# Altium PCB ESP32_garage_door PCB V1_1.PcbDoc
Units mil, origin at the board's own origin, x right, y up, seen from the top; angles counter-clockwise.
Board outline 6000 x 4000 mil, 2 copper layers (Top Layer, Bottom Layer); 26 components, 60 nets, 108 pads, 0 vias.
Unrouted connection lines stored in the file: 48.
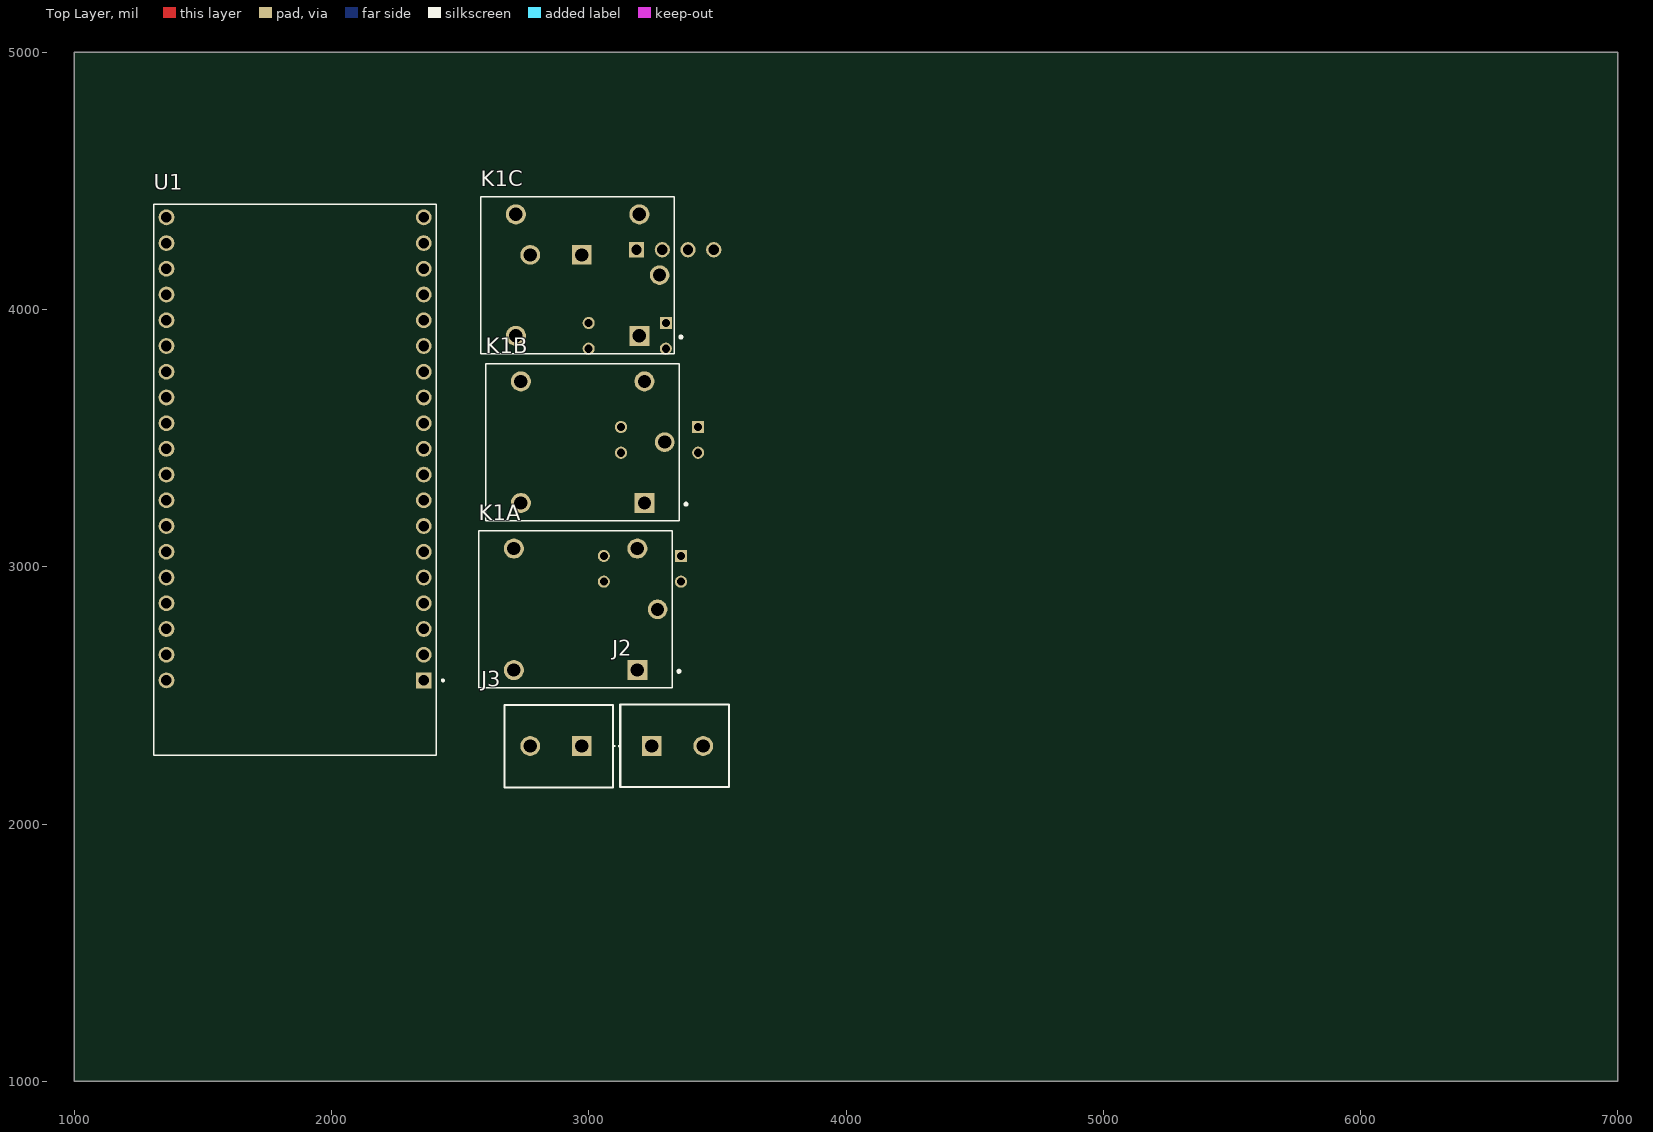
[diagram p0: Top Layer view]
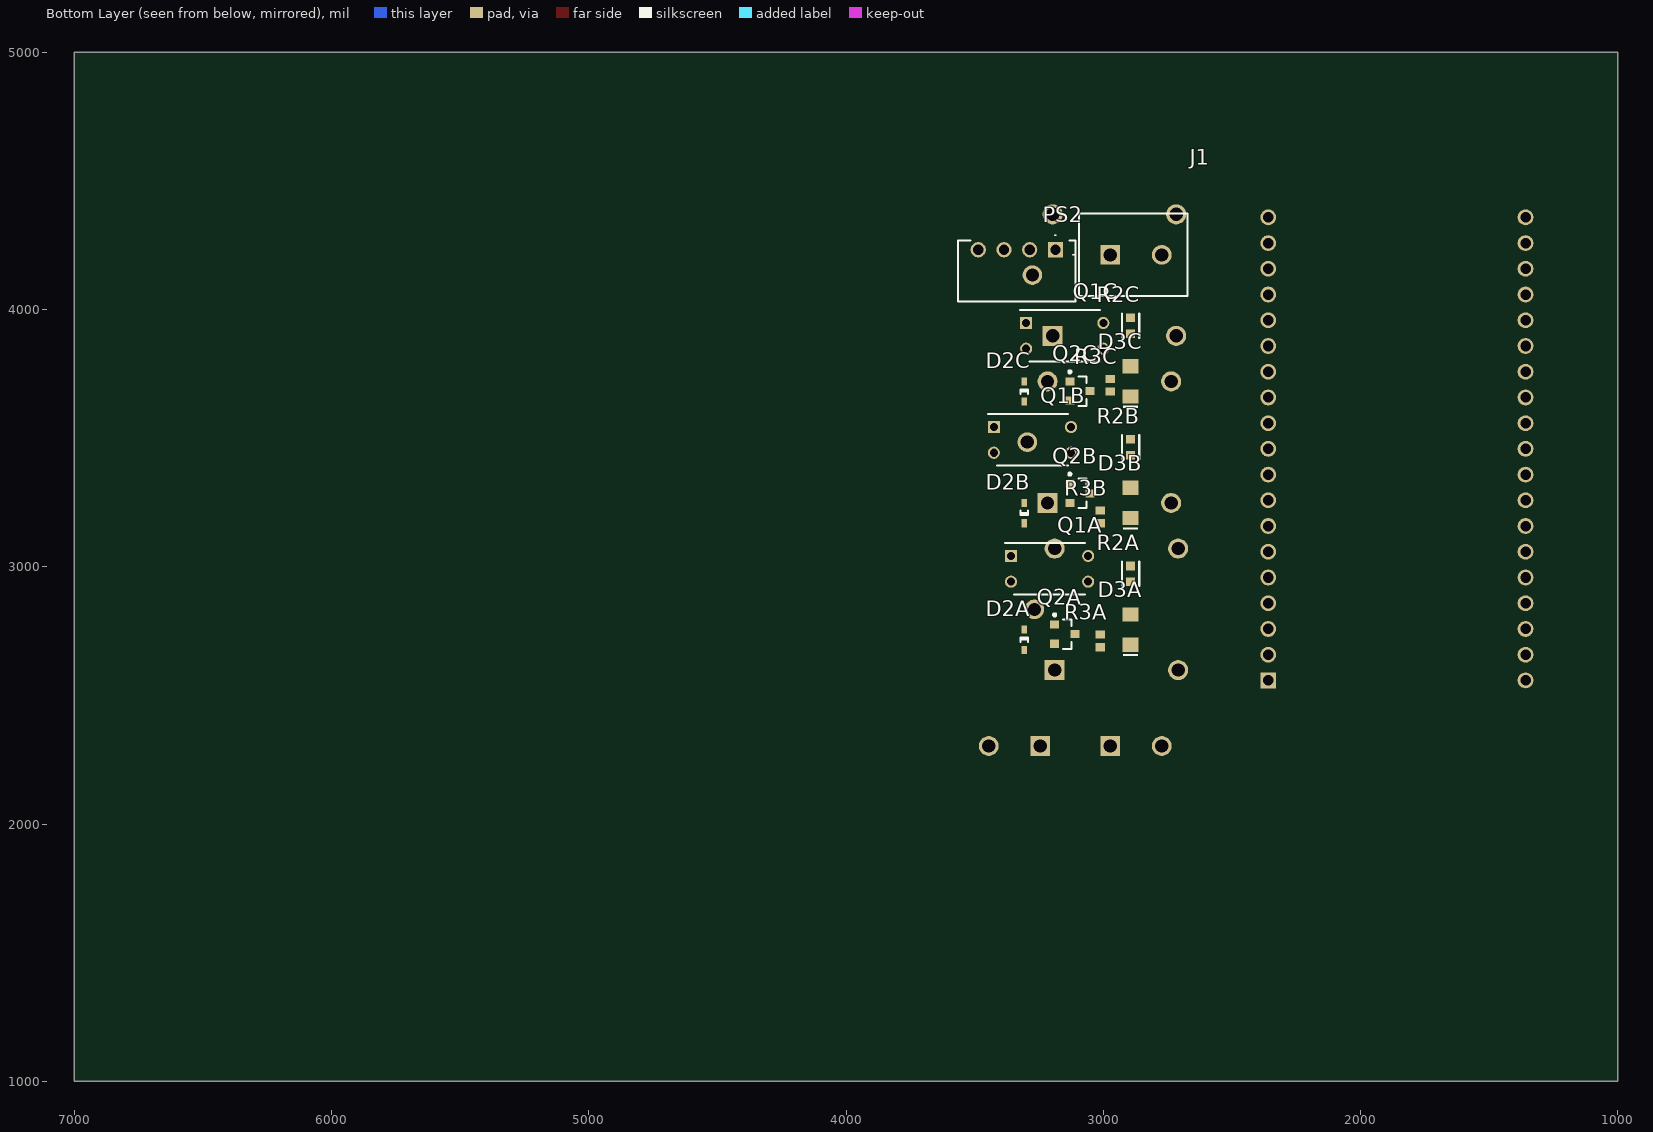
[diagram p1: Bottom Layer view, seen from below]

## Layer stack, top to bottom
Top Solder: solder mask 0.4, Solder Resist, Dk 3.5
Top Layer: signal copper 1.4
Dielectric 1: dielectric 12.6, FR-4, Dk 4.8
Bottom Layer: signal copper 1.4
Bottom Solder: solder mask 0.4, Solder Resist, Dk 3.5

## Board outline
1000,1000 7000,1000 7000,5000 1000,5000

## Design rules (kind name [scope] priority, off if disabled: settings)
Clearance [All] p1: gap=10 ignorepadtopadclearanceinfootprint=FALSE
PolygonConnect [All] p1: connectstyle=Relief reliefconductorwidth=10 reliefentries=4 polygonreliefangle="90 Angle" airgapwidth=10
RoutingVias [All] p1: holewidth=28 width=50 viastyle="Through Hole" minholewidth=28 minwidth=50 maxholewidth=28 maxwidth=50
SolderMaskExpansion [All] p1: expansion=4 istentingtop=FALSE
SupplyNets "Schematic Supply Nets_3" [InNet('24V')] p1: voltage=0.000
SupplyNets "Schematic Supply Nets_2" [InNet('3V3')] p2: voltage=0.000
SupplyNets "Schematic Supply Nets_1" [InNet('GND')] p3: voltage=0.000
SupplyNets "Schematic Supply Nets" [InNet('5V')] p4: voltage=0.000
Width [All] p1: maxlimit=10 minlimit=10 preferedwidth=10
30 further rules are at their usual default settings.

## Classes and differential pairs
channel class 1_Channel_Opto_Relay: U_1_Channel_Opto_Relay1 U_1_Channel_Opto_Relay2 U_1_Channel_Opto_Relay3
component class U_1_Channel_Opto_Relay3: D2C D3C K1C Q1C Q2C R2C R3C
component class U_1_Channel_Opto_Relay2: D2B D3B K1B Q1B Q2B R2B R3B
component class U_1_Channel_Opto_Relay1: D2A D3A K1A Q2A R2A R3A
component class ESP32_garage_door: J1 J2 J3 PS2 U1

## Components (designator, comment, footprint, x,y, rotation, side; value= is the part's Value field where it differs from the comment)
D2A "1N4148WT" FAIR-SOD-523F-2_V 3307.09,2716.54 r270 bottom (schematic designator D2)
D2B "1N4148WT" FAIR-SOD-523F-2_V 3307.09,3208.66 r90 bottom (schematic designator D2)
D2C "1N4148WT" FAIR-SOD-523F-2_V 3307.09,3681.1 r270 bottom (schematic designator D2)
D3A "150120YS75000" WL-SMCW_1206_150120xx75000 2893.7,2755.91 r90 bottom (schematic designator D3)
D3B "150120YS75000" WL-SMCW_1206_150120xx75000 2893.7,3248.03 r90 bottom (schematic designator D3)
D3C "150120YS75000" WL-SMCW_1206_150120xx75000 2893.7,3720.47 r90 bottom (schematic designator D3)
J1 "1548128" 1548128 2972.44,4212.6 r180 bottom
J2 "1548128" 1548128 3244.88,2303.15 r0 top
J3 "1548128" 1548128 2972.44,2303.15 r180 top
K1A "SRD-05VDC-SL-C" RELAY_SRD-05VDC-SL-C 2948.82,2834.65 r180 top (schematic designator K1)
K1B "SRD-05VDC-SL-C" RELAY_SRD-05VDC-SL-C 2976.38,3484.25 r180 top (schematic designator K1)
K1C "SRD-05VDC-SL-C" RELAY_SRD-05VDC-SL-C 2956.69,4133.86 r180 top (schematic designator K1)
PS2 "1779205311" 1779205311 3185.83,4232.28 r0 bottom
Q1A "LTV-817C" DIP762W60P254L460H450Q4N 3208.66,2992.13 r180 bottom (schematic designator Q1)
Q1B "LTV-817C" DIP762W60P254L460H450Q4N 3275.2,3493.31 r180 bottom (schematic designator Q1)
Q1C "LTV-817C" DIP762W60P254L460H450Q4N 3149.61,3897.64 r180 bottom (schematic designator Q1)
Q2A "MMBTA42LT1G" ONSC-SOT-23-3-318-08_V 3149.61,2738.19 r180 bottom (schematic designator Q2)
Q2B "MMBTA42LT1G" ONSC-SOT-23-3-318-08_V 3090.55,3285.43 r180 bottom (schematic designator Q2)
Q2C "MMBTA42LT1G" ONSC-SOT-23-3-318-08_V 3090.55,3683.07 r180 bottom (schematic designator Q2)
R2A "AC0603FR-071KL" FP-AC0603-IPC_B 2893.7,2972.44 r90 bottom (schematic designator R2)
R2B "AC0603FR-071KL" FP-AC0603-IPC_B 2893.7,3464.57 r270 bottom (schematic designator R2)
R2C "AC0603FR-071KL" FP-AC0603-IPC_B 2893.7,3937.01 r90 bottom (schematic designator R2)
R3A "CRCW0603510RFKEA" RESC1609X50X30NL10T20 3011.81,2711.61 r270 bottom (schematic designator R3)
R3B "CRCW0603510RFKEA" RESC1609X50X30NL10T20 3011.81,3193.9 r270 bottom (schematic designator R3)
R3C "CRCW0603510RFKEA" RESC1609X50X30NL10T20 2972.44,3705.71 r270 bottom (schematic designator R3)
U1 "ESP32-DEVKITC-32D" MODULE_ESP32-DEVKITC-32D 1858.27,3336.22 r180 top

## Footprints (in the part's own frame and the unit in brackets; to place one, negate y for a bottom-side part, rotate by r counter-clockwise, add the part's x,y. Pads: shape width x height; smd on the part's side, far side on the other; paste and mask are expansions set on the pad)
1548128 [mm]
  rect 1.95x1.95 hole 1.3: 1(0,0)
  round 1.95 hole 1.3: 2(5.08,0)
  silkscreen extent -3.7,-4.05 7.62,4.1, body extent -0.57,0 10.15,8.15, height 9.97
1779205311 [mm]
  rect 1.5x1.5 hole 1: 1(0,0)
  round 1.5 hole 1: 2(2.54,0) 3(5.08,0) 4(7.62,0)
  silkscreen extent -1.99,-1.5 9.61,5.1, body extent -1.99,-0.9 9.61,5.1, height 10.51
DIP762W60P254L460H450Q4N [mm]
  rect 1.2x1.2 hole 0.8: 1(-3.81,1.27)
  round 1.2 hole 0.8: 2(-3.81,-1.27) 3(3.81,-1.27) 4(3.81,1.27)
  silkscreen extent -4.41,-2.55 3.5,2.55, body extent -3.96,-2.3 3.96,2.3, height 4.5
FAIR-SOD-523F-2_V [mm] "SMD, 2-Leads, Body 1.2x0.8mm, Height 0.7mm"
  rect 0.8x0.5 smd: 1(-1,0) 2(1,0)
  silkscreen extent -0.2,-0.38 0.24,0.38, body extent -0.6,-0.4 0.6,0.4, height 0.71
FP-AC0603-IPC_B [mil]
  rect 33.81x35.91 smd paste+0 mask+0: 1(-30.58,0) 2(30.58,0)
  silkscreen extent -47,-34 47,34, body extent -31,-16 31,16, height 22
MODULE_ESP32-DEVKITC-32D [mm]
  rect 1.56x1.56 / inner round 1.56 / far side rect 1.56x1.56 hole 1.04: J2-1(-12.7,19.76)
  round 1.56 hole 1.04: J2-2(-12.7,17.22) J2-3(-12.7,14.68) J2-4(-12.7,12.14) J2-5(-12.7,9.6) J2-6(-12.7,7.06) J2-7(-12.7,4.52) J2-8(-12.7,1.98) J2-9(-12.7,-0.56) J2-10(-12.7,-3.1) J2-11(-12.7,-5.64) J2-12(-12.7,-8.18) J2-13(-12.7,-10.72) J2-14(-12.7,-13.26) J2-15(-12.7,-15.8) J2-16(-12.7,-18.34) J2-17(-12.7,-20.88) J2-18(-12.7,-23.42) J2-19(-12.7,-25.96) J3-1(12.7,19.76) J3-2(12.7,17.22) J3-3(12.7,14.68) J3-4(12.7,12.14) J3-5(12.7,9.6) J3-6(12.7,7.06) J3-7(12.7,4.52) J3-8(12.7,1.98) J3-9(12.7,-0.56) J3-10(12.7,-3.1) J3-11(12.7,-5.64) J3-12(12.7,-8.18) J3-13(12.7,-10.72) J3-14(12.7,-13.26) J3-15(12.7,-15.8) J3-16(12.7,-18.34) J3-17(12.7,-20.88) J3-18(12.7,-23.42) J3-19(12.7,-25.96)
  silkscreen extent -14.7,-27.25 13.95,27.15, body extent -13.97,-27.9 13.97,27.2, height 6.69
ONSC-SOT-23-3-318-08_V [mm] "SOT23, 3-Leads, Body 2.92x1.3mm, Pitch 0.95mm"
  rect 0.9x0.8 smd: 1(-1,0.95) 2(-1,-0.95) 3(1,0)
  silkscreen extent -1.13,-1.46 0.65,2.02, body extent -0.65,-1.46 0.65,1.46, height 1.11
RELAY_SRD-05VDC-SL-C [mm]
  rect 1.98x1.98 / inner round 1.98 / far side rect 1.98x1.98 hole 1.32: A1(-6.1,6)
  round 1.98 hole 1.32: A2(-6.1,-6) NC(6.1,6) NO(6.1,-6)
  round 1.935 hole 1.29: COM(-8.1,0)
  silkscreen extent -10.3,-7.75 9.55,7.75, body extent -9.6,-7.8 9.6,7.8, height 15.8
RESC1609X50X30NL10T20 [mm] "Chip Resistor, 2-Leads, Body 1.55x0.85mm, IPC Medium Density"
  rect 0.8x0.95 smd: 1(-0.625,0) 2(0.625,0)
  body extent -0.82,-0.48 0.82,0.48, height 0.5
WL-SMCW_1206_150120xx75000 [mm] "SMD Mono-color Chip LED, body 3.2x1.6mm"
  rect 1.4x1.6 smd: 1(-1.5,0) 2(1.5,0)
  silkscreen extent -2.6,-0.75 -2.4,0.75, body extent -1.6,-0.8 1.6,0.8, height 0.68

## Part data
D2A D2B D2C: library part CMP-0881-00001-1, "High Conductance Fast Switching Diode, 75 V, -55 to 150 degC, 2-Pin SOD523F, RoHS", Manufacturer="Fairchild Semiconductor", Temperature Range="-55 to 150 degC", BVR (IR="5 uA)=75 V Min.", CO="4 pF Max.", ComponentLink1Description="Manufacturer URL", ComponentLink1URL=http://www.fairchildsemi.com/, ComponentLink2Description=Datasheet, ComponentLink2URL=http://www.fairchildsemi.com/ds/1N/1N4148WT.pdf, DatasheetVersion="Rev. A2", IR (VR="75 V)=5 uA Max.", Mounting Technology="Surface Mount", PackageDescription="2-Pin Surface Mount Device, Body 1.2 x 0.8 mm, Height 0.7 mm", PackageReference=SOD-523F-2, PartNumber=1N4148WT, RoHS=TRUE, VF="1 V Max."
D3A D3B D3C: library part CMP-1426-00019-3, "Led, Yellow, 590 Nm, 2 V, 30 Ma, 120 Mcd Rohs Compliant: Yes", Case Code (Imperial)=1206, Case Code (Metric)=3216, Color=Yellow, Forward Current=100mA, Forward Voltage=2V, Max Operating Temperature=85°C, Max Reverse Voltage (DC)=5V, Min Operating Temperature=-40°C, Test Current=20mA, Case/Package=1206, Dominant Wavelength=590nm, Height=680µm, Length=3.2mm, Lens Style="Clear, Rectangular", Luminous Intensity=120mcd, Mount="Surface Mount", Packaging="Tape and Reel", Peak Wavelength=595nm, REACH SVHC=Unknown, RoHS=Compliant, Viewing Angle=140°, Wavelength=590nm, Width=1.6mm
J1 J2 J3: "Connector", Manufacturer_Name="Phoenix Contact", Mouser Part Number=651-1548128, Datasheet Link=https://product-download.phoenixcontact.com/8064728?response-content-disposition=inline;%20filename%3D%22pxc_1548128_00_05_MKDSN-1-5-2-5-08-SPE_FAM.pdf%22&Expires=1710663383&Signature=dNE3xUpP8aZKNM7MbijW96iZv~1ZSU7z-jr1GpV8auc4knETZVFd79aWCcONAeV4hWLRa32, Height=10.15mm, Manufacturer_Part_Number=1548128, Mouser Price/Stock=https://www.mouser.co.uk/ProductDetail/Phoenix-Contact/1548128?qs=ulEaXIWI0c87QOzP9yohxA%3D%3D
K1A K1B K1C: library part CMP-003-000000-1, "5V Trigger Relay Module For Arduino And Raspberry Pi 5V Trigger Relay Module For Arduino And Raspberry Pi", Package="NON STANDARD-5 Songle Relay", Availability="Not in stock", Check_prices=https://www.snapeda.com/parts/SRD-05VDC-SL-C/Songle+Relay/view-part/?ref=eda, Component Type=Standard, Design Item ID=SRD-05VDC-SL-C, MF="Songle Relay", MP=SRD-05VDC-SL-C, Pin Count=5, Price=None, SnapEDA_Link=https://www.snapeda.com/parts/SRD-05VDC-SL-C/Songle+Relay/view-part/?ref=snap, Source=SRD-05VDC-SL-C.SchLib
PS2: "Power Supply", Manufacturer_Name="Wurth Elektronik", Datasheet Link=https://www.we-online.com/components/products/datasheet/1779205311.pdf, Height=10.41mm, Manufacturer_Part_Number=1779205311
Q1A Q1B Q1C: "Phototransistor", Manufacturer_Name=Lite-On, Mouser Part Number=859-LTV-817C, Arrow Part Number=LTV-817C, Arrow Price/Stock=https://www.arrow.com/en/products/ltv-817-c/lite-on-technology?utm_currency=USD&region=europe, Datasheet Link=https://optoelectronics.liteon.com/upload/download/DS-70-96-0016/LTV-8X7%20series%20201610%20.pdf, Height=4.5mm, Manufacturer_Part_Number=LTV-817C, Mouser Price/Stock=https://www.mouser.co.uk/ProductDetail/Lite-On/LTV-817C?qs=WAWaI72GHKzVL8VAYU18sA%3D%3D
Q2A Q2B Q2C: library part CMP-1048-00662-1, "High Voltage Transistor, NPN Silicon, 3-Pin SOT-23, Pb-Free, Tape and Reel", Manufacturer="On Semiconductor", ComponentLink1Description="Manufacturer URL", ComponentLink1URL=http://www.onsemi.com/, ComponentLink2Description=Datasheet, ComponentLink2URL=http://www.onsemi.cn/pub_link/Collateral/MMBTA42LT1-D.PDF, ComponentLink3Description="Package Specification", ComponentLink3URL=http://www.onsemi.cn/pub_link/Collateral/318-08.PDF, DatasheetVersion="Rev. 12", fT Min (MHz)=50, IC Continuous (A)=0.5, Mounting Technology="Surface Mount", PackageDescription="3-Pin Small Outline Transistor, Body 2.92 x 1.3 mm, Pitch 0.95 mm", PackageReference=SOT-23-3-318-08, PackageVersion="Rev. AP, 11/2009", Packing="Tape and Reel", PartNumber=MMBTA42LT1G, Polarity=NPN, RoHS=TRUE
R2A R2B R2C: library part CMP-2000-04828-3, "RES 1kΩ 1.00% 0.1W 0603", Case Code (Imperial)=0603, Case Code (Metric)=1608, Max Operating Temperature=155°C, Max Power Dissipation=100mW, Min Operating Temperature=-55°C, Package Quantity=1, Ratings=AEC-Q200, Resistance=1kR, Resistor Type="Thick Film", Temperature Coefficient=100ppm/°C, Tolerance=1%, Voltage Rating=50V, Case/Package=0603, Construction=Rectangular, Depth=0.8mm, Features="Moisture Resistant", Height=0.022inch, Lead Free="Lead Free", Length=0.063inch, Military Standard=Not, Number of Terminations=2, Packaging="Tape and Reel", Power Rating=100mW, RoHS Compliant=Yes, Series=AC, Size Code=0603, Termination=SMD/SMT, Width=0.031inch
R3A R3B R3C: library part CMP-2000-03439-1, Manufacturer="Vishay Dale", Part Number=CRCW0603510RFKEA
U1: library part CMP-005-000000-1, "WiFi Development Tools (802.11) ESP32 General Development Kit, ESP32-WROOM-32D on the board", Package=None, Check_prices=https://www.snapeda.com/parts/ESP32-DEVKITC-32D/Espressif+Systems/view-part/?ref=eda, Component Type=Standard, Design Item ID=ESP32-DEVKITC-32D, MF="Espressif Systems", MP=ESP32-DEVKITC-32D, Pin Count=38, SnapEDA_Link=https://www.snapeda.com/parts/ESP32-DEVKITC-32D/Espressif+Systems/view-part/?ref=snap, Source=ESP32-DEVKITC-32D.SchLib

## Nets (pads, with @x,y where several pads share a name; then routed paths per layer and width w, separated by ;. In a path a pad name is that pad's centre, name@x,y a point inside that pad or via, vN(x,y) a via of type N, cw(c..) or ccw(c..) an arc to the next point about the centre after c; other vN are vias at no path point)
3V3: R2A.1 R2B.1 R2C.1 U1.J2-1
5V: D2A.1 D2B.1 D2C.1 K1A.A1 K1B.A1 K1C.A1 PS2.4 Q1A.4 Q1B.4 Q1C.4 U1.J2-19
24V: J1.2 PS2.2
CLK: U1.J3-19
CMD: U1.J2-18
DOWN: D3B.1 U1.J3-9
EN: U1.J2-2
GND: PS2.3 Q2A.2 Q2B.2 Q2C.2 U1.J2-14 U1.J3-1 U1.J3-7
IO0: U1.J3-14
IO2: U1.J3-15
IO4: U1.J3-13
IO5: U1.J3-10
IO12: U1.J2-13
IO13: U1.J2-15
IO14: U1.J2-12
IO15: U1.J3-16
IO16: U1.J3-12
IO21: U1.J3-6
IO22: U1.J3-3
IO23: U1.J3-2
IO25: U1.J2-9
IO26: U1.J2-10
IO27: U1.J2-11
IO32: U1.J2-7
IO33: U1.J2-8
IO34: U1.J2-5
IO35: U1.J2-6
NetD2A_2: D2A.2 K1A.A2 Q2A.3
NetD2B_2: D2B.2 K1B.A2 Q2B.3
NetD2C_2: D2C.2 K1C.A2 Q2C.3
NetD3A_2: D3A.2 Q1A.2
NetD3B_2: D3B.2 Q1B.2
NetD3C_2: D3C.2 Q1C.2
NetJ1_1: J1.1 PS2.1
NetJ2_1: J2.1 K1A.COM K1B.COM K1C.COM
NetJ2_2: J2.2 K1C.NO
NetJ3_1: J3.1 K1B.NO
NetJ3_2: J3.2 K1A.NC
NetK1A_NO: K1A.NO
NetK1B_NC: K1B.NC
NetK1C_NC: K1C.NC
NetQ1A_1: Q1A.1 R2A.2
NetQ1A_3: Q1A.3 R3A.1
NetQ1B_1: Q1B.1 R2B.2
NetQ1B_3: Q1B.3 R3B.1
NetQ1C_1: Q1C.1 R2C.2
NetQ1C_3: Q1C.3 R3C.1
NetQ2A_1: Q2A.1 R3A.2
NetQ2B_1: Q2B.1 R3B.2
NetQ2C_1: Q2C.1 R3C.2
RXD0: U1.J3-5
SD0: U1.J3-18
SD1: U1.J3-17
SD2: U1.J2-16
SD3: U1.J2-17
SENSOR_VN: U1.J2-4
SENSOR_VP: U1.J2-3
STOP: D3A.1 U1.J3-8
TXD0: U1.J3-4
UP: D3C.1 U1.J3-11